# Altium PCB PCB1.PcbDoc
Units mm, origin at the board's own origin, x right, y up, seen from the top; angles counter-clockwise.
Board outline 125 x 100 mm, 2 copper layers (Top Layer, Bottom Layer); 6 components, 18 nets, 138 pads, 12 vias.
Unrouted connection lines stored in the file: 1.
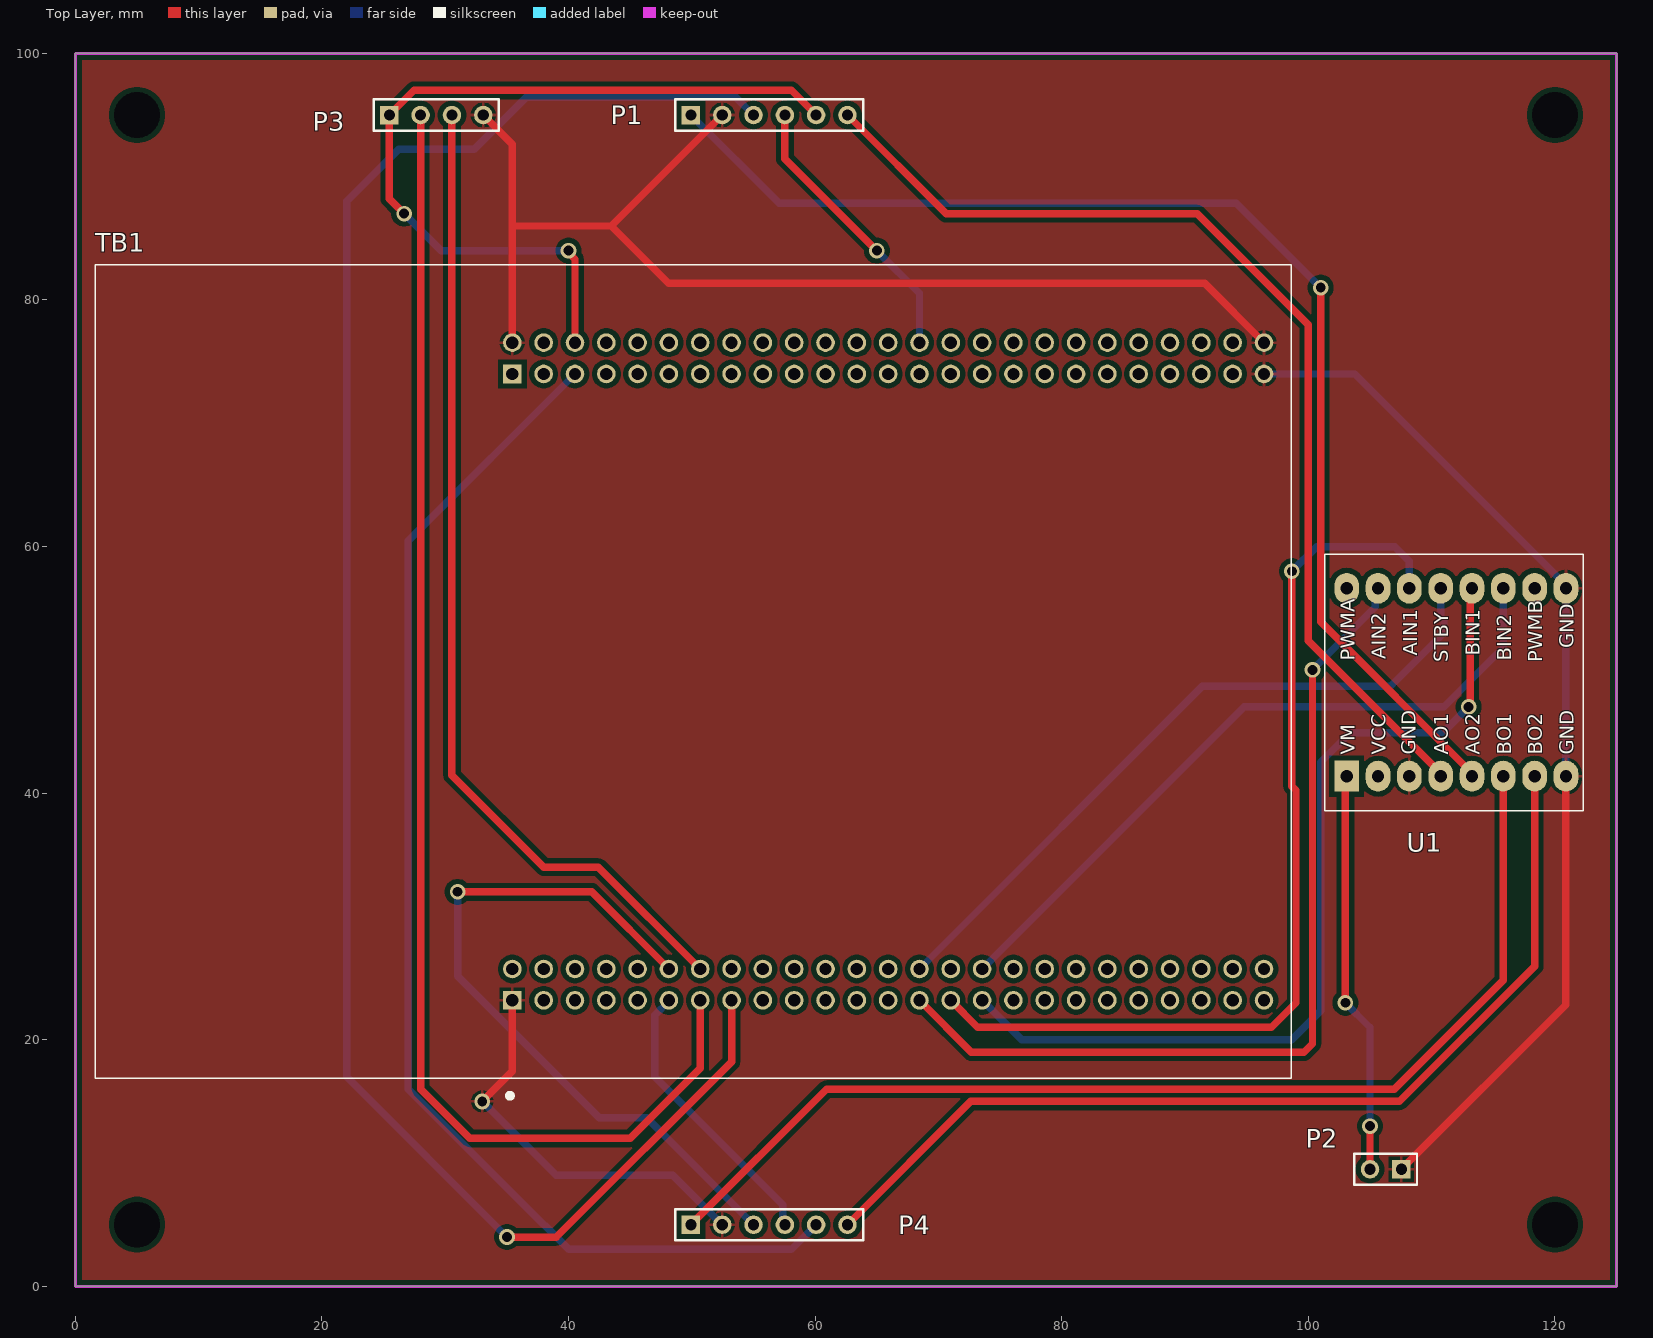
[diagram p0: Top Layer view]
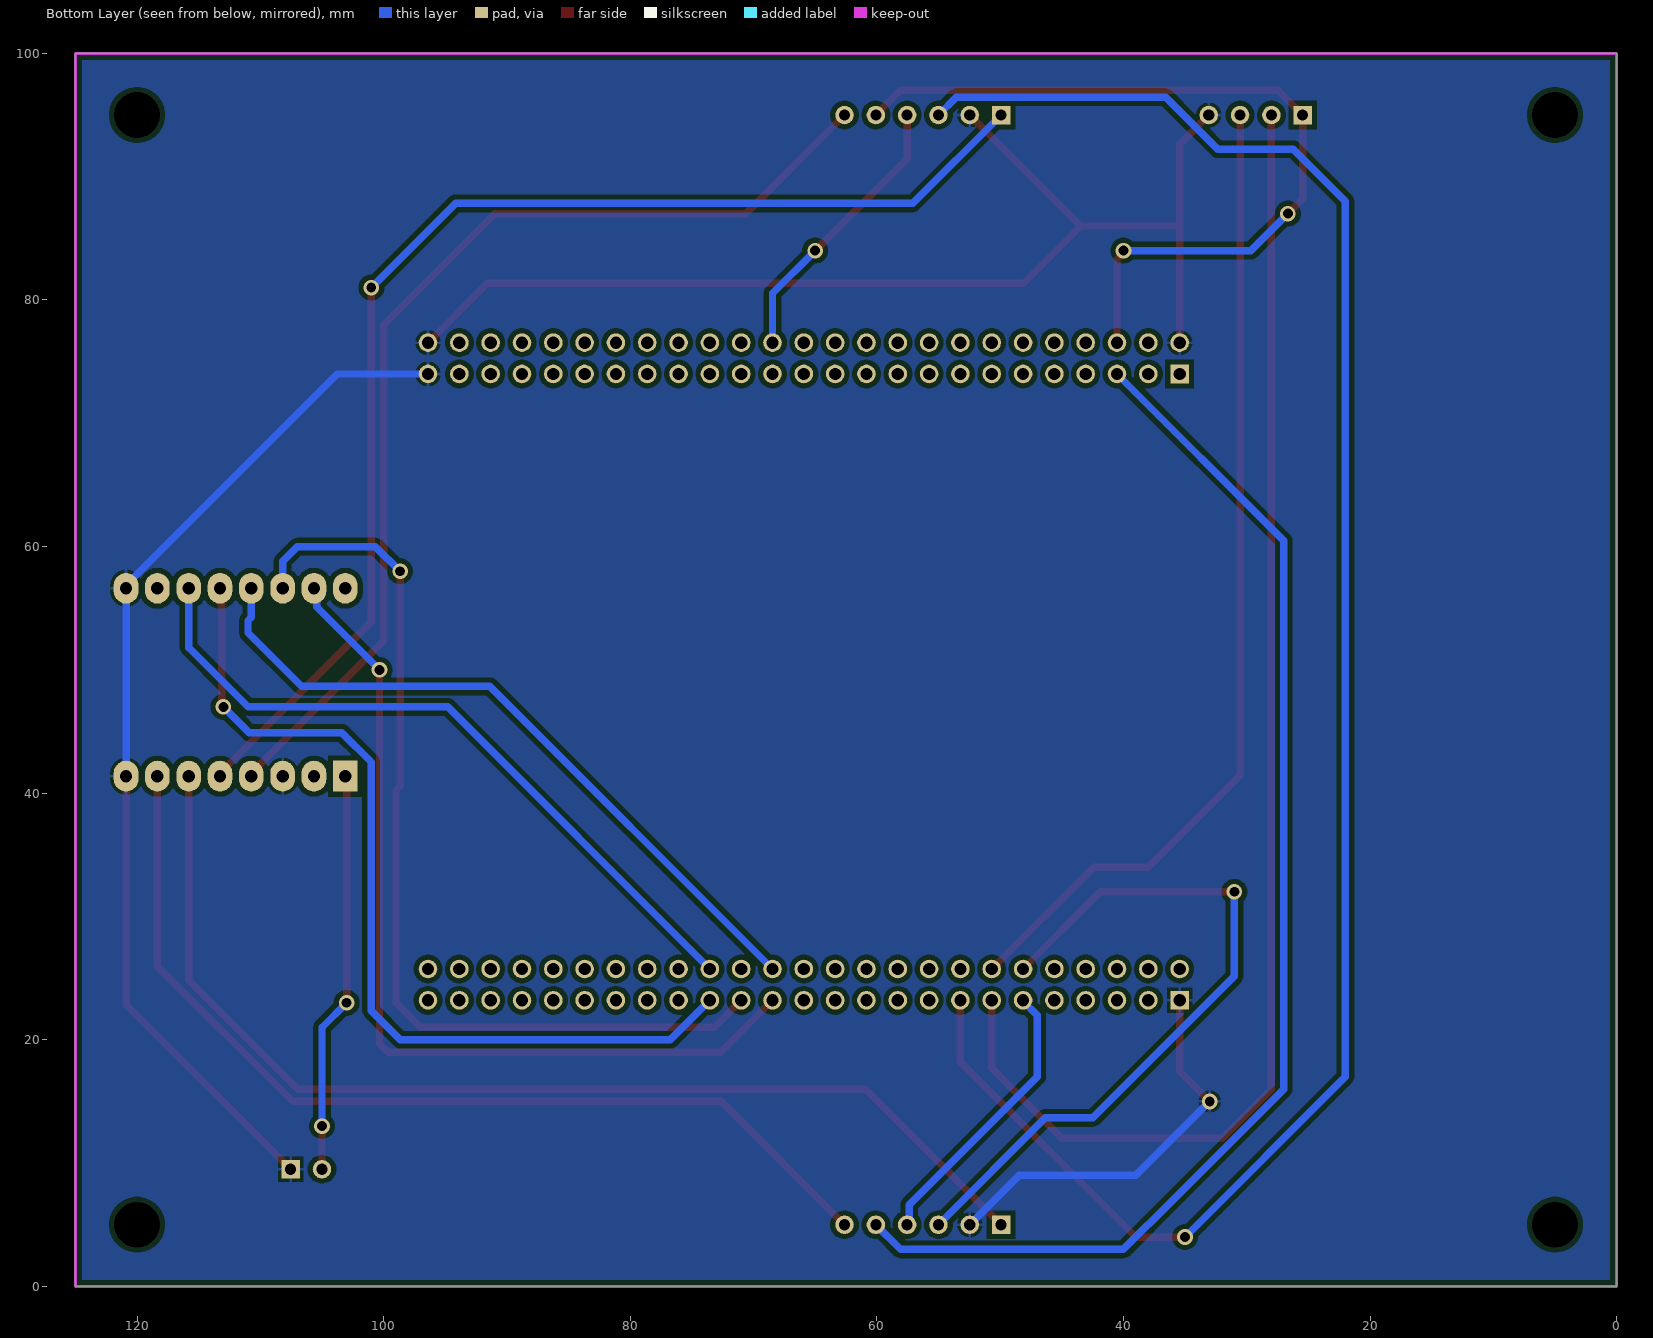
[diagram p1: Bottom Layer view, seen from below]

## Layer stack, top to bottom
Top Solder: solder mask 0.0102, Solder Resist, Dk 3.5
Top Layer: signal copper 0.0356
Dielectric 1: dielectric 0.32, FR-4, Dk 4.8
Bottom Layer: signal copper 0.0356
Bottom Solder: solder mask 0.0102, Solder Resist, Dk 3.5

## Board outline
0,0 0,100 125,100 125,0

## Design rules (kind name [scope] priority, off if disabled: settings)
Clearance [All] p1: gap=0.4 ignorepadtopadclearanceinfootprint=FALSE
PolygonConnect [All] p1: connectstyle=Relief reliefconductorwidth=0.254 reliefentries=4 polygonreliefangle="90 Angle" airgapwidth=0.254
RoutingVias [All] p1: holewidth=0.8 width=1.27 viastyle="Through Hole" minholewidth=0.8 minwidth=1.27 maxholewidth=0.8 maxwidth=1.27
SolderMaskExpansion [All] p1: expansion=0.102 istentingtop=FALSE
Width [All] p1: maxlimit=0.6 minlimit=0.3 preferedwidth=0.508
30 further rules are at their usual default settings.

## Components (designator, comment, footprint, x,y, rotation, side; value= is the part's Value field where it differs from the comment)
P1 "left_motor" HDR1X6 49.92,95 r0 top
P2 "Header 2" HDR1X2 107.54,9.5 r180 top
P3 "Header 4" HDR1X4 25.46,95 r0 top
P4 "right motor" HDR1X6 49.92,5 r0 top
TB1 "STM32F4DISCOVERY" MODULE_STM32F4DISCOVERY 50.12,49.87 r90 top
U1 "MODULE_TB6612FNG" MODULE_TB6612FNG 112,49 r90 top

## Footprints (in the part's own frame and the unit in brackets; to place one, negate y for a bottom-side part, rotate by r counter-clockwise, add the part's x,y. Pads: shape width x height; smd on the part's side, far side on the other; paste and mask are expansions set on the pad)
HDR1X2 [mm] "Connector; Header; 2 Position"
  rect 1.5x1.5 hole 0.9: 1(0,0)
  round 1.5 hole 0.9: 2(2.54,0)
  silkscreen extent -1.27,-1.27 3.81,1.27
HDR1X4 [mm] "Connector; Header; 4 Position"
  rect 1.5x1.5 hole 0.9: 1(0,0)
  round 1.5 hole 0.9: 2(2.54,0) 3(5.08,0) 4(7.62,0)
  silkscreen extent -1.27,-1.27 8.89,1.27
HDR1X6 [mm] "Connector; Header; 6 Position"
  rect 1.5x1.5 hole 0.9: 1(0,0)
  round 1.5 hole 0.9: 2(2.54,0) 3(5.08,0) 4(7.62,0) 5(10.16,0) 6(12.7,0)
  silkscreen extent -1.27,-1.27 13.97,1.27
MODULE_STM32F4DISCOVERY [mm]
  rect 1.508x1.508 hole 1: P1_1(-26.67,14.68) P2_1(24.13,14.68)
  round 1.508 hole 1: P1_2(-24.13,14.68) P1_3(-26.67,12.14) P1_4(-24.13,12.14) P1_5(-26.67,9.6) P1_6(-24.13,9.6) P1_7(-26.67,7.06) P1_8(-24.13,7.06) P1_9(-26.67,4.52) P1_10(-24.13,4.52) P1_11(-26.67,1.98) P1_12(-24.13,1.98) P1_13(-26.67,-0.56) P1_14(-24.13,-0.56) P1_15(-26.67,-3.1) P1_16(-24.13,-3.1) P1_17(-26.67,-5.64) P1_18(-24.13,-5.64) P1_19(-26.67,-8.18) P1_20(-24.13,-8.18) P1_21(-26.67,-10.72) P1_22(-24.13,-10.72) P1_23(-26.67,-13.26) P1_24(-24.13,-13.26) P1_25(-26.67,-15.8) P1_26(-24.13,-15.8) P1_27(-26.67,-18.34) P1_28(-24.13,-18.34) P1_29(-26.67,-20.88) P1_30(-24.13,-20.88) P1_31(-26.67,-23.42) P1_32(-24.13,-23.42) P1_33(-26.67,-25.96) P1_34(-24.13,-25.96) P1_35(-26.67,-28.5) P1_36(-24.13,-28.5) P1_37(-26.67,-31.04) P1_38(-24.13,-31.04) P1_39(-26.67,-33.58) P1_40(-24.13,-33.58) P1_41(-26.67,-36.12) P1_42(-24.13,-36.12) P1_43(-26.67,-38.66) P1_44(-24.13,-38.66) P1_45(-26.67,-41.2) P1_46(-24.13,-41.2) P1_47(-26.67,-43.74) P1_48(-24.13,-43.74) P1_49(-26.67,-46.28) P1_50(-24.13,-46.28) P2_2(26.67,14.68) P2_3(24.13,12.14) P2_4(26.67,12.14) P2_5(24.13,9.6) P2_6(26.67,9.6) P2_7(24.13,7.06) P2_8(26.67,7.06) P2_9(24.13,4.52) P2_10(26.67,4.52) P2_11(24.13,1.98) P2_12(26.67,1.98) P2_13(24.13,-0.56) P2_14(26.67,-0.56) P2_15(24.13,-3.1) P2_16(26.67,-3.1) P2_17(24.13,-5.64) P2_18(26.67,-5.64) P2_19(24.13,-8.18) P2_20(26.67,-8.18) P2_21(24.13,-10.72) P2_22(26.67,-10.72) P2_23(24.13,-13.26) P2_24(26.67,-13.26) P2_25(24.13,-15.8) P2_26(26.67,-15.8) P2_27(24.13,-18.34) P2_28(26.67,-18.34) P2_29(24.13,-20.88) P2_30(26.67,-20.88) P2_31(24.13,-23.42) P2_32(26.67,-23.42) P2_33(24.13,-25.96) P2_34(26.67,-25.96) P2_35(24.13,-28.5) P2_36(26.67,-28.5) P2_37(24.13,-31.04) P2_38(26.67,-31.04) P2_39(24.13,-33.58) P2_40(26.67,-33.58) P2_41(24.13,-36.12) P2_42(26.67,-36.12) P2_43(24.13,-38.66) P2_44(26.67,-38.66) P2_45(24.13,-41.2) P2_46(26.67,-41.2) P2_47(24.13,-43.74) P2_48(26.67,-43.74) P2_49(24.13,-46.28) P2_50(26.67,-46.28)
  silkscreen extent -34.61,-48.5 33,48.5
MODULE_TB6612FNG [mm] "Module Dual Motor Driver 2.5-13.5V 3.2A Peak 21x18mm"
  rect 2.5x2 hole 1: 1(-7.62,8.89)
  oval 2.5x2 hole 1: 2(-7.62,6.35) 3(-7.62,3.81) 4(-7.62,1.27) 5(-7.62,-1.27) 6(-7.62,-3.81) 7(-7.62,-6.35) 8(-7.62,-8.89) 9(7.62,-8.89) 10(7.62,-6.35) 11(7.62,-3.81) 12(7.62,-1.27) 13(7.62,1.27) 14(7.62,3.81) 15(7.62,6.35) 16(7.62,8.89)
  silkscreen extent -10.44,-10.28 10.39,10.67, body extent -10.45,-10.28 10.45,10.7, height 6.12

## Part data
P1 P4: library part "Header 6", "Header, 6-Pin", LatestRevisionDate=17-Jul-2002, LatestRevisionNote="Re-released for DXP Platform.", Publisher="Altium Limited"
P2: "Header, 2-Pin", LatestRevisionDate=17-Jul-2002, LatestRevisionNote="Re-released for DXP Platform.", Publisher="Altium Limited"
P3: "Header, 4-Pin", LatestRevisionDate=17-Jul-2002, LatestRevisionNote="Re-released for DXP Platform.", Publisher="Altium Limited"
TB1: "Development kit: ARM ST; pin strips, pin header; No.of", PACKAGE=None, Availability=Unavailable, MP=STM32F4DISCOVERY, Price=None
U1: "Module Dual Motor Driver 2.5-13.5V 3.2A Peak 21x18mm", ComponentLink1Description=Datasheet, ComponentLink1URL=https://www.mouser.com/datasheet/2/408/TB6612FNG_datasheet_en_20141001-708260.pdf

## Free pads (board coordinates)
  round 1.524 hole 3.7: 1(120,95) 2(5,95) 3(5,5) 8(120,5)

## Via types
v1: diameter 1.27, hole 0.8, Top Layer to Bottom Layer, 12 vias

## Nets (pads, with @x,y where several pads share a name; then routed paths per layer and width w, separated by ;. In a path a pad name is that pad's centre, name@x,y a point inside that pad or via, vN(x,y) a via of type N, cw(c..) or ccw(c..) an arc to the next point about the centre after c; other vN are vias at no path point)
AIN1: TB1.P1_29 U1.14 | length 77.9
  Top Layer w0.6: TB1.P1_29 73.2,21 97,21 99,23 99,40.242 98.665,40.577 v1(98.665,58)
  Bottom Layer w0.6: v1(98.665,58) 100.665,60 107,60 108.19,58.81 U1.14
AIN2: TB1.P1_27 U1.15 | length 73
  Top Layer w0.6: TB1.P1_27 72.66,19 99.649,19 100.335,19.686 v1(100.335,50)
  Bottom Layer w0.6: v1(100.335,50) 105.434,55.099 105.434,56.404 U1.15
BIN1: TB1.P1_31 U1.12 | length 73.5
  Top Layer w0.6: v1(113,47) 113.128,47.128 113.128,56.478 U1.12
  Bottom Layer w0.6: TB1.P1_31 76.74,20 98.649,20 101.017,22.369 101.017,42.527 103.386,44.896 110.896,44.896 v1(113,47)
BIN2: TB1.P1_32 U1.11 | length 57.9
  Bottom Layer w0.6: TB1.P1_32 94.8,47 111,47 115.81,51.81 U1.11
EN_DRIVER: TB1.P1_28 U1.13 | length 57.6
  Bottom Layer w0.6: TB1.P1_28 91.385,48.665 106.665,48.665 111,53 111,54 110.73,54.27 U1.13
ENC_A_L: P1.3 TB1.P1_15 | length 155.6
  Top Layer w0.6: v1(35,4) 39,4 53.22,18.22 TB1.P1_15
  Bottom Layer w0.6: v1(35,4) 22,17 22,88 26.225,92.225 32.356,92.225 36.581,96.45 53.55,96.45 P1.3
ENC_A_R: P4.3 TB1.P1_12 | length 58.9
  Top Layer w0.6: v1(31,32) 41.88,32 TB1.P1_12
  Bottom Layer w0.6: v1(31,32) 31,25.142 42.478,13.664 46.336,13.664 P4.3
ENC_B_L: P1.4 TB1.P2_28 | length 23
  Top Layer w0.6: P1.4 57.54,91.46 v1(65,84)
  Bottom Layer w0.6: v1(65,84) 68.46,80.54 TB1.P2_28
ENC_B_R: P4.4 TB1.P1_11 | length 23
  Bottom Layer w0.6: TB1.P1_11 48.14,23.141 47,22.001 47,17 57.368,6.632 57.368,5.172 P4.4
GND: P1.2 P2.1 P3.4 P4.2 TB1.P1_1 TB1.P2_2 TB1.P2_49 TB1.P2_50 U1.3 U1.8 U1.9 | length 214.3
  Top Layer w0.6: v1(33,15) 35.44,17.44 TB1.P1_1 ; P3.4 35.44,92.64 35.44,86 ; TB1.P2_2 35.44,86 ; P1.2 43.46,86 ; TB1.P2_50 91.583,81.357 48.103,81.357 43.46,86 ; P2.1 120.89,22.85 U1.8 ; 35.44,86 43.46,86
  Bottom Layer w0.6: v1(33,15) 39,9 48.46,9 P4.2 ; TB1.P2_49 103.76,74 120.89,56.87 U1.9 U1.8
M+_L: P1.1 U1.5 | length 101.6
  Top Layer w0.6: v1(101,81) 101,53.9 113.27,41.63 U1.5
  Bottom Layer w0.6: P1.1 57.081,87.839 94.161,87.839 v1(101,81)
M+_R: P4.1 U1.6 | length 90.7
  Top Layer w0.6: P4.1 60.92,16 106.976,16 115.81,24.834 U1.6
M-_L: P1.6 U1.4 | length 85.5
  Top Layer w0.6: P1.6 70.62,87 91,87 100,78 100,52.36 110.73,41.63 U1.4
M-_R: P4.6 U1.7 | length 79.8
  Top Layer w0.6: P4.6 72.62,15 107.391,15 118.35,25.959 U1.7
RX: P3.2 TB1.P1_13 | length 111.2
  Top Layer w0.6: P3.2 28,16 32,12 45,12 50.68,17.68 TB1.P1_13
TX: P3.3 TB1.P1_14 | length 80.2
  Top Layer w0.6: P3.3 30.54,41.46 38,34 42.42,34 TB1.P1_14
VCC: P1.5 P3.1 P4.5 TB1.P2_5 TB1.P2_6 | length 169.9
  Top Layer w0.6: v1(26.665,87) 25.46,88.205 P3.1 27.46,97 58.08,97 P1.5 ; v1(40,84) 40,83.819 40.52,83.299 TB1.P2_6
  Bottom Layer w0.6: v1(26.665,87) 29.665,84 v1(40,84) ; TB1.P2_5 27,60.48 27,16 36,7 40,3 58.08,3 P4.5
VM: P2.2 U1.1 | length 32.8
  Top Layer w0.6: v1(103,23) 103,41.27 U1.1 ; P2.2 v1(105,13)
  Bottom Layer w0.6: v1(103,23) 105,21 v1(105,13)
pads on no net: TB1.P1_2 TB1.P1_3 TB1.P1_4 TB1.P1_5 TB1.P1_6 TB1.P1_7 TB1.P1_8 TB1.P1_9 TB1.P1_10 TB1.P1_16 TB1.P1_17 TB1.P1_18 TB1.P1_19 TB1.P1_20 TB1.P1_21 TB1.P1_22 TB1.P1_23 TB1.P1_24 TB1.P1_25 TB1.P1_26 TB1.P1_30 TB1.P1_33 TB1.P1_34 TB1.P1_35 TB1.P1_36 TB1.P1_37 TB1.P1_38 TB1.P1_39 TB1.P1_40 TB1.P1_41 TB1.P1_42 TB1.P1_43 TB1.P1_44 TB1.P1_45 TB1.P1_46 TB1.P1_47 TB1.P1_48 TB1.P1_49 TB1.P1_50 TB1.P2_1 TB1.P2_3 TB1.P2_4 TB1.P2_7 TB1.P2_8 TB1.P2_9 TB1.P2_10 TB1.P2_11 TB1.P2_12 TB1.P2_13 TB1.P2_14 TB1.P2_15 TB1.P2_16 TB1.P2_17 TB1.P2_18 TB1.P2_19 TB1.P2_20 TB1.P2_21 TB1.P2_22 TB1.P2_23 TB1.P2_24 TB1.P2_25 TB1.P2_26 TB1.P2_27 TB1.P2_29 TB1.P2_30 TB1.P2_31 TB1.P2_32 TB1.P2_33 TB1.P2_34 TB1.P2_35 TB1.P2_36 TB1.P2_37 TB1.P2_38 TB1.P2_39 TB1.P2_40 TB1.P2_41 TB1.P2_42 TB1.P2_43 TB1.P2_44 TB1.P2_45 TB1.P2_46 TB1.P2_47 TB1.P2_48 U1.2 U1.10 U1.16

## Polygon pours and split planes (outlines as drawn)
GND on Bottom Layer "NONET_L-01_P-001" (solid, remove dead copper, pour order 0): 0,100 125,100 125,0 0,0
GND on Top Layer "NONET_L-01_P-001" (solid, remove dead copper, pour order 1): 0,100 125,100 125,0 0,0

## Keep-outs
Keep-Out Layer:
  lines w0.254: 0,0 125,0 125,100 0,100 0,0.025

## Text inside footprints (layer, text, board x,y; h text height)
U1: Top Overlay "STBY" at 111.365,50.626 h1.14 r90; Top Overlay "AIN1" at 108.825,51.134 h1.14 r90; Top Overlay "BIN2" at 116.445,50.753 h1.14 r90; Top Overlay "PWMB" at 118.985,50.626 h1.14 r90; Top Overlay "BIN1" at 113.905,51.134 h1.14 r90; Top Overlay "GND" at 121.525,51.769 h1.14 r90; Top Overlay "AIN2" at 106.285,50.88 h1.14 r90; Top Overlay "PWMA" at 103.745,50.753 h1.14 r90; Top Overlay "GND" at 108.698,43.133 h1.14 r90; Top Overlay "BO1" at 116.445,43.133 h1.14 r90; Top Overlay "BO2" at 118.985,43.133 h1.14 r90; Top Overlay "AO2" at 113.905,43.133 h1.14 r90; Top Overlay "AO1" at 111.365,43.133 h1.14 r90; Top Overlay "GND" at 121.525,43.133 h1.14 r90; Top Overlay "VCC" at 106.285,43.133 h1.14 r90; Top Overlay "VM" at 103.745,43.133 h1.14 r90